# Altium PCB PCB1.PcbDoc (part 2 of 2)
Units mil, origin at the board's own origin, x right, y up, seen from the top; angles counter-clockwise.
Board outline 3937.01 x 3937.01 mil, 2 copper layers (Top Layer, Bottom Layer); 101 components, 66 nets, 397 pads, 63 vias.
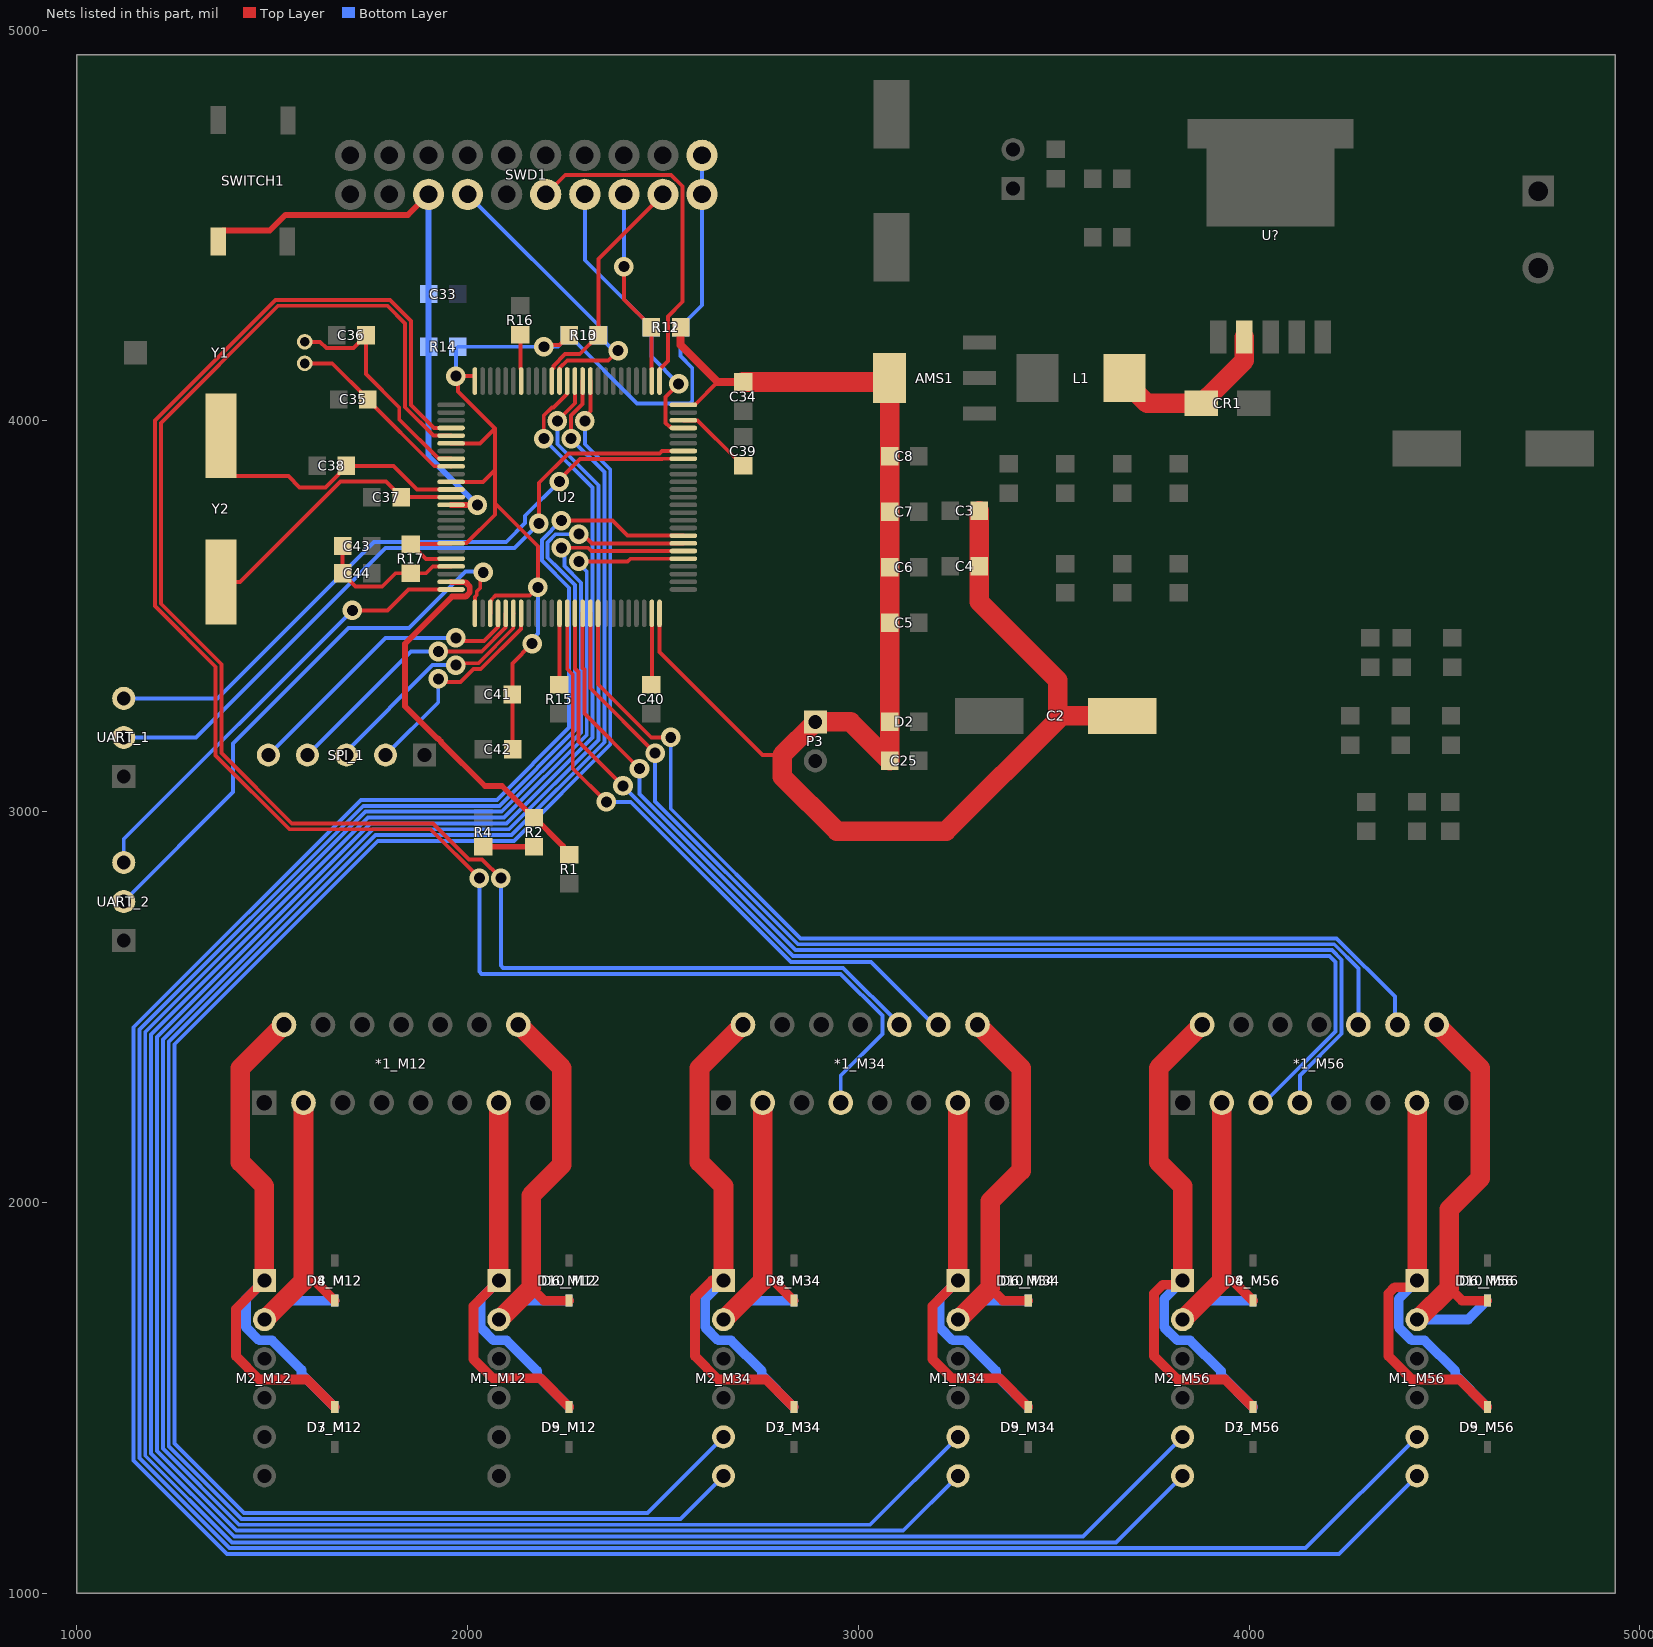
[diagram p2: the nets of this part, all layers, seen from the top]

## Via types
v1: diameter 50, hole 28, Top Layer to Bottom Layer, 63 vias

## Nets (pads, with @x,y where several pads share a name; then routed paths per layer and width w, separated by ;. In a path a pad name is that pad's centre, name@x,y a point inside that pad or via, vN(x,y) a via of type N, cw(c..) or ccw(c..) an arc to the next point about the centre after c; other vN are vias at no path point) (continued)
M3CTL2: *1_M34.7 U2.4 | length 4458.7
  Top Layer w10: U2.4@1957.76,3982.12 1957.41,3982.47 1913.89,3982.47 1855,4041.36 1855,4256.21 1801.21,4310 1508.79,4310 1200,4001.21 1200,3526.07 1355,3371.07 1355,3143.79 1543.79,2955 1905,2955 v1(2030,2830)
  Bottom Layer w10: v1(2030,2830) 2030,2590.86 2035.86,2585 2954.9,2585 3061.5,2478.4 3061.5,2431.51 2955,2325.02 *1_M34.7@2955,2255
M3EC1: M2_M34.5 U2.85 | length 4977.6
  Top Layer w10: v1(2300,4000) 2300,4010.82 2314.06,4024.88 U2.85@2314.06,4102.2
  Bottom Layer w10: v1(2300,4000) 2300,3940.5 2365,3875.5 2365,3171.51 2118.49,2925 1770.15,2925 1250,2404.85 1250,1382.57 1427.57,1205 2460,1205 M2_M34.5@2655,1400
M3EC2: M2_M34.6 U2.86 | length 4981.9
  Top Layer w10: v1(2265,3955) 2265,4014.5 2294.37,4043.87 U2.86@2294.37,4102.2
  Bottom Layer w10: v1(2265,3955) 2265,3954.29 2350,3869.29 2350,3177.72 2112.28,2940 1763.93,2940 1235,2411.07 1235,1376.36 1421.36,1190 2545,1190 M2_M34.6@2655,1300
M4CTL1: *1_M34.10 U2.5 | length 4194.7
  Top Layer w10: U2.5@1957.76,3962.44 1912.71,3962.44 1840,4035.15 1840,4250 1795,4295 1515,4295 1215,3995 1215,3532.28 1370,3377.28 1370,3150 1550,2970 1911.21,2970 2003.46,2877.76 2037.24,2877.76 v1(2085,2830)
  Bottom Layer w10: v1(2085,2830) 2085,2605.86 2090.86,2600 2961.11,2600 3105,2456.11 *1_M34.10@3105,2455
M4CTL2: *1_M34.12 U2.38 | length 1610.2
  Top Layer w10: U2.38@2255,3507.71 2255,3365.21 2269.06,3351.15 2269.06,3110.94 v1(2355,3025)
  Bottom Layer w10: v1(2355,3025) 2417.57,3025 2827.57,2615 3032.64,2615 3192.64,2455 *1_M34.12@3205,2455
M4EC1: M1_M34.5 U2.87 | length 5669
  Top Layer w10: v1(2230,4000) 2230,4000.71 2274.68,4045.4 U2.87@2274.68,4102.2
  Bottom Layer w10: v1(2230,4000) 2230,3940.5 2335,3835.5 2335,3183.93 2106.07,2955 1757.72,2955 1220,2417.28 1220,1370.15 1415.15,1175 3030,1175 M1_M34.5@3255,1400
M4EC2: M1_M34.6 U2.88 | length 5676
  Top Layer w10: v1(2195,3955) 2195,4014.5 2215.5,4035 2220.14,4035 2254.65,4069.52 2254.65,4101.85 U2.88@2255,4102.2
  Bottom Layer w10: v1(2195,3955) 2195,3954.29 2320,3829.29 2320,3190.15 2099.85,2970 1751.51,2970 1205,2423.49 1205,1363.93 1408.93,1160 3115,1160 M1_M34.6@3255,1300
M5CTL1: *1_M56.5 U2.39 | length 2947.5
  Top Layer w10: U2.39@2274.68,3507.71 2274.68,3366.73 2284.06,3357.36 2284.06,3179.73 v1(2397.71,3066.08)
  Bottom Layer w10: v1(2397.71,3066.08) 2833.11,2630.68 4205.68,2630.68 4221.5,2614.86 4221.5,2437.81 4038.68,2255 *1_M56.5@4030,2255
M5CTL2: *1_M56.7 U2.40 | length 2905.3
  Top Layer w10: U2.40@2294.37,3507.71 2294.37,3368.26 2299.06,3363.58 2299.06,3250.94 v1(2440,3110)
  Bottom Layer w10: v1(2440,3110) 2440,3045 2839.32,2645.68 4211.89,2645.68 4236.5,2621.08 4236.5,2431.6 4130,2325.1 *1_M56.7@4130,2255
M5EC1: M2_M56.5 U2.55 | length 6061.3
  Top Layer w10: v1(2285,3640.53) 2285.53,3640 2409.11,3640 2416.59,3647.47 U2.55@2552.24,3647.47
  Bottom Layer w10: v1(2285,3640.53) 2285,3634.68 2305,3614.68 2305,3196.36 2093.64,2985 1745.29,2985 1190,2429.71 1190,1357.72 1402.72,1145 3575,1145 M2_M56.5@3830,1400
M5EC2: M2_M56.6 U2.56 | length 6143.2
  Top Layer w10: v1(2240,3675) 2240.53,3675.53 2308.51,3675.53 2316.89,3667.16 U2.56@2552.24,3667.16
  Bottom Layer w10: v1(2240,3675) 2247.65,3667.35 2247.65,3628.38 2290,3586.04 2290,3202.57 2087.43,3000 1739.08,3000 1175,2435.92 1175,1351.51 1396.51,1130 3660,1130 M2_M56.6@3830,1300
M6CTL1: *1_M56.10 U2.41 | length 2671.3
  Top Layer w10: U2.41@2314.06,3507.71 2314.06,3315.94 v1(2480,3150)
  Bottom Layer w10: v1(2480,3150) 2480,3035 2479.75,3034.75 2479.75,3026.46 2845.53,2660.68 4218.11,2660.68 4280,2598.79 *1_M56.10@4280,2455
M6CTL2: *1_M56.12 U2.42 | length 2733.6
  Top Layer w10: U2.42@2333.74,3507.71 2333.74,3326.25 2469.99,3190 v1(2520,3190)
  Bottom Layer w10: v1(2520,3190) 2520,3007.43 2851.75,2675.68 4224.32,2675.68 4373.5,2526.5 4373.5,2461.5 *1_M56.12@4380,2455
M6EC1: M1_M56.5 U2.57 | length 6888.3
  Top Layer w10: v1(2285,3710.53) 2294.72,3710.53 2318.41,3686.84 U2.57@2552.24,3686.84
  Bottom Layer w10: v1(2285,3710.53) 2284.47,3710 2225.5,3710 2205,3689.5 2205,3650 2235,3620 2235,3619.82 2275,3579.82 2275,3208.79 2081.21,3015 1732.87,3015 1160,2442.13 1160,1345.29 1390.29,1115 4145,1115 M1_M56.5@4430,1400
M6EC2: M1_M56.6 U2.58 | length 6917.4
  Top Layer w10: v1(2240,3745) 2240.53,3745.53 2370.41,3745.53 2409.41,3706.53 U2.58@2552.24,3706.53
  Bottom Layer w10: v1(2240,3745) 2239.29,3745 2190,3695.71 2190,3643.08 2260,3573.08 2260,3215 2075,3030 1726.65,3030 1145,2448.35 1145,1339.08 1384.08,1100 4230,1100 M1_M56.6@4430,1300
MOTOR_A_OUTPUT1_M12: *1_M12.2 D3_M12.2 D7_M12.1 M2_M12.1 | length 1713.8
  Top Layer w25: M2_M12.1@1480,1800 1407.1,1727.1 1407.1,1606.39 1466.47,1547.03 1588.97,1547.03 1659.5,1476.5 D3_M12.2@1660,1476.5
  Top Layer w50: M2_M12.1@1480,1800 1480,2041.51 1418.5,2103.01 1418.5,2343.5 *1_M12.2@1530,2455
  Bottom Layer w25: M2_M12.1@1480,1800 1432.97,1752.97 1432.97,1680.52 1466.47,1647.03 1499.48,1647.03 1575.02,1571.49 1575.02,1560.98 1659.5,1476.5 D7_M12.1@1660,1476.5
MOTOR_A_OUTPUT1_M34: *1_M34.2 D3_M34.2 D7_M34.1 M2_M34.1 | length 1731.4
  Top Layer w25: M2_M34.1@2655,1800 2625,1800 2582.1,1757.1 2582.1,1606.39 2641.47,1547.03 2763.97,1547.03 2834.5,1476.5 D3_M34.2@2835,1476.5
  Top Layer w50: M2_M34.1@2655,1800 2655,2041.51 2593.5,2103.01 2593.5,2343.5 *1_M34.2@2705,2455
  Bottom Layer w25: M2_M34.1@2655,1800 2607.97,1752.97 2607.97,1680.52 2641.47,1647.03 2674.48,1647.03 2752.99,1568.52 2752.99,1558.01 2834.5,1476.5 D7_M34.1@2835,1476.5
MOTOR_A_OUTPUT1_M56: *1_M56.2 D3_M56.2 D7_M56.1 M2_M56.1 | length 1736.7
  Top Layer w25: M2_M56.1@3830,1800 3818.96,1788.96 3778.96,1788.96 3757.1,1767.1 3757.1,1606.39 3816.47,1547.03 3938.97,1547.03 D3_M56.2@4009.5,1476.5
  Top Layer w50: M2_M56.1@3830,1800 3830,2041.51 3768.5,2103.01 3768.5,2343.5 *1_M56.2@3880,2455
  Bottom Layer w25: M2_M56.1@3830,1800 3782.97,1752.97 3782.97,1680.52 3816.47,1647.03 3849.48,1647.03 3927.99,1568.52 3927.99,1558.01 4009.5,1476.5 D7_M56.1@4010,1476.5
MOTOR_A_OUTPUT2_M12: *1_M12.3 D4_M12.2 D8_M12.1 M2_M12.2 | length 898.1
  Top Layer w25: 1580,1798.52 1609.48,1798.52 1659.5,1748.5 D4_M12.2@1660,1748.5
  Top Layer w50: M2_M12.2@1480,1700 1481.48,1700 1580,1798.52 *1_M12.3@1580,2255
  Bottom Layer w25: M2_M12.2@1480,1700 1528.5,1748.5 D8_M12.1@1660,1748.5
MOTOR_A_OUTPUT2_M34: *1_M34.3 D4_M34.2 D8_M34.1 M2_M34.2 | length 898.1
  Top Layer w25: 2755,1798.52 2784.48,1798.52 2834.5,1748.5 D4_M34.2@2835,1748.5
  Top Layer w50: M2_M34.2@2655,1700 2656.48,1700 2755,1798.52 *1_M34.3@2755,2255
  Bottom Layer w25: M2_M34.2@2655,1700 2703.5,1748.5 D8_M34.1@2835,1748.5
MOTOR_A_OUTPUT2_M56: *1_M56.3 D4_M56.2 D8_M56.1 M2_M56.2 | length 898.1
  Top Layer w20: M2_M56.2@3830,1700 M2_M56.2@3831.48,1700
  Top Layer w25: 3930,1798.52 3959.48,1798.52 4009.5,1748.5 D4_M56.2@4010,1748.5
  Top Layer w50: M2_M56.2@3831.48,1700 3930,1798.52 *1_M56.3@3930,2255
  Bottom Layer w25: M2_M56.2@3830,1700 3878.5,1748.5 D8_M56.1@4010,1748.5
MOTOR_B_OUTPUT1_M12: *1_M12.13 D5_M12.2 D9_M12.1 M1_M12.1 | length 1435.6
  Top Layer w25: M1_M12.1@2080,1800 2015,1735 2015,1598.49 2063.49,1550 2186,1550 2259.5,1476.5 D5_M12.2@2260,1476.5
  Top Layer w50: M1_M12.1@2080,1800 *1_M12.13@2080,2255
  Bottom Layer w25: M1_M12.1@2080,1800 2032.97,1752.97 2032.97,1680.52 2066.47,1647.03 2099.48,1647.03 2177.99,1568.52 2177.99,1558.01 2259.5,1476.5 D9_M12.1@2260,1476.5
MOTOR_B_OUTPUT1_M34: *1_M34.13 D5_M34.2 D9_M34.1 M1_M34.1 | length 1435.1
  Top Layer w25: M1_M34.1@3255,1800 3190,1735 3190,1598.49 3238.49,1550 3361,1550 D5_M34.2@3434.5,1476.5
  Top Layer w50: M1_M34.1@3255,1800 *1_M34.13@3255,2255
  Bottom Layer w25: M1_M34.1@3255,1800 3207.97,1752.97 3207.97,1680.52 3241.47,1647.03 3274.48,1647.03 3352.99,1568.52 3352.99,1558.01 3434.5,1476.5 D9_M34.1@3435,1476.5
MOTOR_B_OUTPUT1_M56: *1_M56.13 D5_M56.2 D9_M56.1 M1_M56.1 | length 1465.6
  Top Layer w25: M1_M56.1@4430,1800 4412.97,1782.97 4372.97,1782.97 4357.1,1767.1 4357.1,1606.39 4416.47,1547.03 4538.97,1547.03 4609.5,1476.5 D5_M56.2@4610,1476.5
  Top Layer w50: M1_M56.1@4430,1800 *1_M56.13@4430,2255
  Bottom Layer w25: M1_M56.1@4430,1800 4382.97,1752.97 4382.97,1680.52 4416.47,1647.03 4449.48,1647.03 4527.99,1568.52 4527.99,1558.01 4609.5,1476.5 D9_M56.1@4610,1476.5
MOTOR_B_OUTPUT2_M12: *1_M12.14 D6_M12.2 D10_M12.1 M1_M12.2 | length 1179.9
  Top Layer w25: 2162.6,1781.12 2195.21,1748.5 D6_M12.2@2260,1748.5
  Top Layer w50: M1_M12.2@2080,1700 2081.48,1700 2162.6,1781.12 2162.6,2017.6 2241.5,2096.5 2241.5,2343.5 *1_M12.14@2130,2455
  Bottom Layer w25: M1_M12.2@2080,1700 2128.5,1748.5 D10_M12.1@2260,1748.5
MOTOR_B_OUTPUT2_M34: *1_M34.14 D6_M34.2 D10_M34.1 M1_M34.2 | length 1179.9
  Top Layer w25: 3337.6,1781.12 3370.21,1748.5 D6_M34.2@3435,1748.5
  Top Layer w50: M1_M34.2@3255,1700 3256.48,1700 3337.6,1781.12 3337.6,2002.6 3416.5,2081.5 3416.5,2343.5 *1_M34.14@3305,2455
  Bottom Layer w25: M1_M34.2@3255,1700 3303.5,1748.5 D10_M34.1@3435,1748.5
MOTOR_B_OUTPUT2_M56: *1_M56.14 D6_M56.2 D10_M56.1 M1_M56.2 | length 1179.9
  Top Layer w25: 4512.6,1781.12 4545.21,1748.5 D6_M56.2@4610,1748.5
  Top Layer w50: M1_M56.2@4430,1700 4431.48,1700 4512.6,1781.12 4512.6,1982.6 4591.5,2061.5 4591.5,2343.5 *1_M56.14@4480,2455
  Bottom Layer w25: M1_M56.2@4430,1700 4561,1700 4609.5,1748.5 D10_M56.1@4610,1748.5
NetC35_1: C35.1 U2.9 Y1.1 | length 485.3
  Top Layer w10: Y1.1@1583.11,4147.44 1653.54,4147.44 1744.8,4056.18 C35.1@1744.8,4055 1744.8,4053.82 1914.58,3884.04 1957.41,3884.04 U2.9@1957.76,3883.7
NetC36_1: C36.1 U2.8 Y1.2 | length 602.8
  Top Layer w10: Y1.2@1583.11,4202.56 1622.43,4202.56 1638.61,4186.38 1707.56,4186.38 C36.1@1740,4218.82 ; C36.1@1740,4220 C36.1@1740,4218.82 ; U2.8@1957.76,3903.38 1957.41,3903.73 1925.07,3903.73 1825,4003.8 1825,4035.01 1740,4120.01 C36.1@1740,4218.82
NetC37_1: C37.1 U2.13 Y2.2 | length 712.9
  Top Layer w10: Y2.2@1368.57,3587.99 1417.99,3587.99 1675,3845 1790.98,3845 1829.85,3806.14 C37.1@1829.8,3805 U2.13@1957.76,3804.95
NetC38_1: C38.1 U2.12 Y2.1 | length 732.7
  Top Layer w10: Y2.1@1368.57,3962.01 1368.57,3893.11 1402.94,3858.74 1541.26,3858.74 1570,3830 1635.98,3830 1689.8,3883.82 C38.1@1689.8,3885 1810.01,3885 1870.37,3824.64 U2.12@1957.76,3824.64
NetC39_2: C39.2 U2.73 | length 201.8
  Top Layer w10: U2.73@2552.24,4001.81 2552.59,4001.46 2588.54,4001.46 2686.38,3903.62 2686.38,3902.44 2703.82,3885 C39.2@2705,3885
NetC40_2: C40.2 U2.49 | length 183.3
  Top Layer w10: C40.2@2470,3325 2471.54,3326.54 U2.49@2471.54,3507.71
NetC43_1: C43.1 C44.1 R17.2 U2.22 | length 383.5
  Top Layer w10: C43.1@1680.2,3680 C44.1@1680.2,3610 1680.2,3608.82 1712.64,3576.38 1781.58,3576.38 1815.4,3610.2 R17.2@1855,3610.2 1893.62,3610.2 1910.87,3627.44 1957.41,3627.44 U2.22@1957.76,3627.79
NetCR1_1: CR1.1 L1.1 U?.2 | length 449.3
  Top Layer w50: L1.1@3681.22,4110 3681.22,4103.11 3739.33,4045 3888.5,4045 3896,4052.5 3896,4063 3988.07,4155.07 U?.2@3988.07,4214.86
NetR2_1: R2.1 R4.2 | length 130
  Top Layer w15: R4.2@2040,2910.2 R2.1@2170,2910.2
NetR15_1: R15.1 U2.37 | length 182.8
  Top Layer w10: R15.1@2235,3325 2235.32,3325.32 U2.37@2235.32,3507.71
NetR16_1: R16.1 U2.94 | length 118.8
  Top Layer w10: R16.1@2135,4220.2 2135,4134.11 2136.89,4132.22 U2.94@2136.89,4102.2
REF_12V/6: R1.2 R2.2 U2.24 | length 1030.9
  Top Layer w15: U2.24@1957.76,3588.42 1959.04,3587.14 1994.91,3587.14 2005.69,3576.36 2005.69,3561.11 1994.91,3550.33 1960.33,3550.33 1840,3430 1840,3270 1922.97,3187.03 1924.71,3187.03 1932.03,3179.71 1932.03,3177.97 2044.43,3065.57 2088.25,3065.57 2168.82,2985 R2.2@2170,2985 2171.18,2985 2243.88,2912.3 2243.88,2904.94 2258.82,2890 R1.2@2260,2890
RST: C33.2 R14.2 SWD1.15 SWITCH1.4 U2.14 | length 1511.9
  Top Layer w15: SWITCH1.4@1361.42,4459.49 1361.42,4475.24 1373.6,4487.42 1493.72,4487.42 1533.79,4527.49 1847.49,4527.49 SWD1.15@1900,4580 ; U2.14@1957.76,3785.27 1957.89,3785.13 2024.87,3785.13 v1(2025,3785)
  Bottom Layer w15: SWD1.15@1900,4580 1900.1,4579.9 1900.1,4190.1 R14.2@1900.2,4190 1900.2,3909.8 v1(2025,3785)
SPI_CLK: SPI_1.4 U2.30 | length 679.1
  Top Layer w10: v1(1925,3410) 2036.21,3410 2097.17,3470.96 2097.17,3507.36 U2.30@2097.52,3507.71
  Bottom Layer w10: SPI_1.4@1590,3145 1855,3410 v1(1925,3410)
SPI_MISO: SPI_1.3 U2.31 | length 605.2
  Top Layer w10: v1(1970,3375) 1975,3380 2027.43,3380 2116.86,3469.43 2116.86,3507.36 U2.31@2117.2,3507.71
  Bottom Layer w10: SPI_1.3@1690,3145 1690,3154.5 1910.5,3375 v1(1970,3375)
SPI_MOSI: SPI_1.2 U2.32 | length 561.7
  Top Layer w10: v1(1925,3340) 1932.65,3332.35 1982.35,3332.35 2015,3365 2033.64,3365 2136.54,3467.9 2136.54,3507.36 U2.32@2136.89,3507.71
  Bottom Layer w10: SPI_1.2@1790,3145 1925,3280 v1(1925,3340)
SPI_NSS: SPI_1.5 U2.29 | length 764.8
  Top Layer w10: v1(1970,3445) 1977.65,3437.35 2042.35,3437.35 2077.49,3472.49 2077.49,3507.36 U2.29@2077.83,3507.71
  Bottom Layer w10: SPI_1.5@1490,3145 1790,3445 v1(1970,3445)
SWCLK: SWD1.9 U2.76 | length 905.7
  Top Layer w10: SWD1.9@2200,4580 2250,4630 2520.71,4630 2550,4600.71 2550,4305.21 2512.56,4267.76 2512.56,4153.06 2491.22,4131.73 U2.76@2491.22,4102.2
SWDIO: R11.1 SWD1.7 U2.72 | length 748.8
  Top Layer w10: v1(2540,4095) 2506.81,4061.81 2506.81,3995.22 2516.13,3985.9 2518.45,3985.9 2522.23,3982.12 U2.72@2552.24,3982.12
  Bottom Layer w10: SWD1.7@2300,4580 2300,4411.38 2470.2,4241.18 R11.1@2470.2,4240 2470.2,4164.8 v1(2540,4095)
SWO: R10.1 SWD1.13 U2.89 | length 767.3
  Top Layer w10: U2.89@2235.32,4102.2 2235.66,4102.55 2235.66,4135.66 2255,4155 2360,4155 v1(2385,4180)
  Bottom Layer w10: SWD1.13@2000,4580 2335,4245 R10.1@2335,4220 2335,4218.82 2366.17,4187.65 2377.35,4187.65 v1(2385,4180)
TDI: R12.1 SWD1.5 U2.77 | length 507.4
  Top Layer w10: v1(2400,4395) 2400,4311.38 2470.2,4241.18 R12.1@2470.2,4240 2470.2,4133.56 2471.54,4132.22 U2.77@2471.54,4102.2
  Bottom Layer w10: v1(2400,4395) SWD1.5@2400,4580
TRST: R13.1 SWD1.3 U2.90 | length 617.9
  Top Layer w10: U2.90@2215.98,4102.55 U2.90@2215.63,4102.2 2215.63,4132.22 2219.41,4136 2219.41,4140.62 2249.79,4171 2286.98,4171 2334.8,4218.82 R13.1@2334.8,4220 2334.8,4414.8 SWD1.3@2500,4580
UART1_RX: U2.69 UART_1.2 | length 1797
  Top Layer w10: v1(2182.4,3737.6) 2182.4,3841.89 2257.76,3917.26 2491.76,3917.26 2497.56,3923.07 U2.69@2552.24,3923.07
  Bottom Layer w10: UART_1.2@1120,3190 1305,3190 1790,3675 2119.79,3675 v1(2182.4,3737.6)
UART1_TX: U2.68 UART_1.3 | length 1700.4
  Top Layer w10: v1(2235,3845) 2235,3850 2287.26,3902.26 2497.97,3902.26 2499.09,3903.38 U2.68@2552.24,3903.38
  Bottom Layer w10: UART_1.3@1120,3290 1360,3290 1760,3690 2098.99,3690 2147.4,3738.4 2147.4,3757.4 v1(2235,3845)
UART2_RX: U2.26 UART_2.2 | length 1457.8
  Top Layer w10: U2.26@2018.78,3507.71 2019.13,3508.06 2019.13,3549.8 2023.46,3554.14 2023.46,3563.76 2032.35,3572.65 2032.35,3604.82 v1(2040,3612.47)
  Bottom Layer w10: UART_2.2@1120,2770 1400,3050 1400,3175 1695,3470 1850,3470 1995,3615 2037.47,3615 v1(2040,3612.47)
UART2_TX: U2.25 UART_2.3 | length 1162.3
  Top Layer w10: v1(1705,3515) 1794.74,3515 1848.47,3568.73 U2.25@1957.76,3568.73
  Bottom Layer w10: UART_2.3@1120,2870 1120,2930 v1(1705,3515)
VCC: AMS1.2@3080.34,4110 C2.1 C3.2 C4.2 C5.2 C6.2 C7.2 C8.2 C25.1 C34.2 C41.2 C42.1 D2.1 P3.1 R10.2 R11.2 R12.2 R13.2 R14.1 R17.1 SWD1.1 SWD1.2 U2.6 U2.11 U2.19 U2.21 U2.28 U2.50 U2.75 U2.100 | length 7764.7
  Top Layer w10: R17.1@1855,3685 R17.1@1856.18,3685 ; U2.21@1957.76,3647.47 1957.41,3647.13 1894.05,3647.13 R17.1@1856.18,3685 ; U2.11@1957.76,3844.32 2039.32,3844.32 2070,3875 ; U2.6@1957.76,3942.75 1958.1,3942.4 2031.45,3942.4 2070,3980.95 ; U2.100@2018.78,4102.2 2018.78,4114.16 2017.94,4115 v1(1970,4115) 1975.95,4109.05 1975.95,4075 2070,3980.95 ; U2.28@2058.15,3507.71 2058.15,3537.73 2061.93,3541.51 2061.93,3543.83 2071.25,3553.14 2159.14,3553.14 v1(2180,3574) 2180,3679.5 2070,3789.5 ; C42.1@2115,3160 2115,3299.8 C41.2@2114.8,3300 2114.8,3379.8 v1(2165,3430) ; v1(2195,4190) 2200,4195 2235,4195 2241.38,4201.38 2242.56,4201.38 2260,4218.82 R13.2@2260,4220 ; U2.50@2491.22,3507.71 2491.22,3408.78 2755,3145 2805,3145 ; U2.75@2552.59,4041.52 U2.75@2552.24,4041.18 2581.37,4041.18 2640,4099.8 ; R17.1@1856.18,3685 1925.89,3685 1927.74,3686.84 U2.19@1957.76,3686.84 1958.1,3687.19 1997.19,3687.19 2070,3760 2070,3789.5 ; 2070,3789.5 2070,3875 ; 2070,3875 2070,3980.95
  Top Layer w20: R12.2@2545,4240 2545,4194.8 2640,4099.8 C34.2@2705,4099.8
  Top Layer w50: C34.2@2705,4099.8 3070.15,4099.8 AMS1.2@3080,4109.66 ; AMS1.2@3080.34,4110 AMS1.2@3080,4109.66 ; C3.2@3310,3770.28 C4.2@3310,3628.22 3310,3537.11 3511.01,3336.11 3511.01,3245 3520,3245 ; C2.1@3675.28,3245 3520,3245 ; AMS1.2@3080,4109.66 C8.2@3080,3910 C7.2@3080,3767.94 C6.2@3080,3625.89 C5.2@3080,3483.83 D2.1@3080,3230 C25.1@3080,3130 2980,3230 P3.1@2890,3230 2805,3145 2805,3090 2945,2950 3225,2950 3520,3245
  Bottom Layer w10: v1(1970,4115) 1970,4185 R14.1@1975,4190 v1(2195,4190) 2231.38,4190 R10.2@2260.2,4218.82 ; v1(2165,3430) 2165,3440.82 2180,3455.82 v1(2180,3574) ; R10.2@2260.2,4220 R10.2@2260.2,4218.82 ; SWD1.2@2600,4680 SWD1.1@2600,4580 2600,4296.18 2545,4241.18 R11.2@2545,4240 2545,4165.94 2575,4135.94 2575,4050.86 2569.14,4045 2434.02,4045 R10.2@2260.2,4218.82
pads on no net: AMS1.2@3310.66,4110 SWD1.11 SWD1.17 SWD1.19 SWITCH1.2 SWITCH1.3 U2.7 U2.15 U2.16 U2.17 U2.18 U2.23 U2.33 U2.34 U2.35 U2.36 U2.43 U2.44 U2.45 U2.46 U2.47 U2.48 U2.51 U2.52 U2.53 U2.54 U2.59 U2.60 U2.61 U2.62 U2.63 U2.64 U2.65 U2.66 U2.67 U2.70 U2.71 U2.78 U2.79 U2.80 U2.91 U2.92 U2.93 U2.95 U2.96 U?.5 Y1.4

## Polygon pours and split planes (outlines as drawn)
GND on Top Layer "GND_L01_P045" (solid, remove dead copper, pour order 45): 4930,4930 4930,1005 1005,1005 1005,4930
+12 on Top Layer "+12_L01_P023" (solid, remove dead copper, pour order 23): 4770,4750 4865,4655 4865,4550 4775,4460 4685,4460 4675,4450 4675,3555 4155,3035 4155,2560 4070,2475 1565,2475 1485,2555 1485,2730 2265,2730 2385,2850 3425,2850 3910,3335 3910,3535 4290,3915 4290,4710 4330,4750
+5 on Top Layer "+5_L01_P044" (solid, remove dead copper, pour order 44): 4080,2455 4100,2435 4280,2435 4280,2455 4345,2520 4345,2835 4155,3025 4155,2560 4080,2485
+5 on Top Layer "+5_L01_P000" (solid, remove dead copper, pour order 0): 3570,4225 3635,4290 3635,4610 3600,4645 3150,4645 3040,4535 3040,4360 3250,4150 3350,4150 3370,4130 3370,3980 3350,3960 3350,3885 3385,3850 3830,3850 3850,3830 3850,3610 3835,3595 3510,3595 3495,3580 3495,3510 3625,3380 3850,3380 3900,3430 3900,3525 4285,3910 4285,4280 4250,4315 4140,4315 4090,4265 4090,3925 4015,3850 3990,3850 3890,3950 3645,3950 3570,4025 3570,4040
+5 on Top Layer "+5_L01_P048" (solid, remove dead copper, pour order 48): 3870,1500 3715,1500 3625,1410 3635,1400 3870,1400
+5 on Top Layer "+5_L01_P046" (solid, remove dead copper, pour order 46): 2695,1500 2540,1500 2450,1410 2460,1400 2695,1400
+5 on Top Layer "+5_L01_P039" (solid, remove dead copper, pour order 39): 4080,2455 4130,2455 4330,2255 4430,2255 4430,1400 4140,1400 4080,1460
MOTOR_B_OUTPUT2_M56 on Top Layer "MOTOR_B_OUTPUT2_M56_L01_P020" (solid, remove dead copper, pour order 20): 4450,2530 4415,2495 4415,2385 4460,2340 4520,2340 4560,2300 4560,2135 4460,2035 4460,1815 4430,1785 4380,1785 4380,1625 4405,1600 4555,1600 4640,1685 4640,1767.75 4610,1797.75 4610,1855 4715,1960 4715,2480 4665,2530
+12 on Top Layer "+12_L01_P041" (solid, remove dead copper, pour order 41): 3305,2455 3405,2555 3880,2555 3980,2455 3830,2305 3830,1600 3530,1300 3255,1300 3255,2255
+12 on Top Layer "+12_L01_P040" (solid, remove dead copper, pour order 40): 2130,2455 2230,2555 2705,2555 2805,2455 2655,2305 2655,1600 2355,1300 2080,1300 2080,2255
+5 on Top Layer "+5_L01_P038" (solid, remove dead copper, pour order 38): 2905,2455 2955,2455 3155,2255 3255,2255 3255,1400 2965,1400 2905,1460
+5 on Top Layer "+5_L01_P037" (solid, remove dead copper, pour order 37): 1730,2455 1780,2455 1980,2255 2080,2255 2080,1400 1790,1400 1730,1460
+5 on Top Layer "+5_L01_P036" (solid, remove dead copper, pour order 36): 3830,1600 3886.5,1600 4010,1476.5 4010,1410 4000,1400 3830,1400
+5 on Top Layer "+5_L01_P035" (solid, remove dead copper, pour order 35): 3255,1600 3311.5,1600 3435,1476.5 3435,1410 3425,1400 3255,1400
+5 on Top Layer "+5_L01_P034" (solid, remove dead copper, pour order 34): 2655,1600 2711.5,1600 2835,1476.5 2835,1410 2825,1400 2655,1400
+5 on Top Layer "+5_L01_P032" (solid, remove dead copper, pour order 32): 2080,1600 2136.5,1600 2260,1476.5 2260,1410 2250,1400 2080,1400
+5 on Top Layer "+5_L01_P031" (solid, remove dead copper, pour order 31): 1480,1600 1536.5,1600 1660,1476.5 1660,1410 1650,1400 1480,1400
+12 on Top Layer "+12_L01_P030" (solid, remove dead copper, pour order 30): 3880,2455 4080,2455 4080,2305 4130,2255 4130,1385 4080,1335 3995,1335 3995,1461.5 4010,1476.5 4010,2175 3930,2255
+12 on Top Layer "+12_L01_P029" (solid, remove dead copper, pour order 29): 2705,2455 2905,2455 2905,2305 2955,2255 2955,1385 2905,1335 2820,1335 2820,1461.5 2835,1476.5 2835,2175 2755,2255
+12 on Top Layer "+12_L01_P028" (solid, remove dead copper, pour order 28): 1530,2455 1730,2455 1730,2305 1780,2255 1780,1385 1730,1335 1645,1335 1645,1461.5 1660,1476.5 1660,2175 1580,2255
VCC on Top Layer "VCC_L01_P027" (solid, remove dead copper, pour order 27): 3767.87,3187.87 3767.87,3237.13 3735,3270 3393,3270 3130,3007 3130,2855 3435,2855
+12 on Top Layer "+12_L01_P026" (solid, remove dead copper, pour order 26): 3835,2555 3910,2480 3910,2425 3950,2385 4015,2385 4075,2445 4075,2555
+12 on Top Layer "+12_L01_P025" (solid, remove dead copper, pour order 25): 2660,2555 2735,2480 2735,2425 2775,2385 2840,2385 2900,2445 2900,2555
+12 on Top Layer "+12_L01_P024" (solid, remove dead copper, pour order 24): 1485,2555 1560,2480 1560,2425 1600,2385 1665,2385 1725,2445 1725,2555
+5 on Top Layer "+5_L01_P043" (solid, remove dead copper, pour order 43): 1580,1430 1535,1385 1535,1225 1635,1125 4300,1125 4345,1170 4345,1380 4295,1430
MOTOR_A_OUTPUT2_M56 on Top Layer "MOTOR_A_OUTPUT2_M56_L01_P022" (solid, remove dead copper, pour order 22): 3810,2315 3980,2315 4020,2275 4020,1685 3935,1600 3863.49,1600 3782.97,1680.52 3782.97,1742.97 3810,1770
MOTOR_A_OUTPUT1_M56 on Top Layer "MOTOR_A_OUTPUT1_M56_L01_P021" (solid, remove dead copper, pour order 21): 3775,2505 3880,2505 3915,2470 3915,2315 3810,2315 3810,1910 3875,1845 3875,1785 3845,1755 3735,1755 3670,1820 3670,2400
MOTOR_B_OUTPUT2_M34 on Top Layer "MOTOR_B_OUTPUT2_M34_L01_P019" (solid, remove dead copper, pour order 19): 3275,2530 3240,2495 3240,2385 3285,2340 3345,2340 3385,2300 3385,2135 3285,2035 3285,1815 3255,1785 3205,1785 3205,1625 3230,1600 3380,1600 3465,1685 3465,1767.75 3435,1797.75 3435,1855 3540,1960 3540,2480 3490,2530
MOTOR_B_OUTPUT1_M56 on Top Layer "MOTOR_B_OUTPUT1_M56_L01_P018" (solid, remove dead copper, pour order 18): 4365,2330 4480,2330 4515,2295 4515,2045 4470,2000 4470,1770 4440,1740 4325,1740 4260,1805 4260,2120 4345,2205 4365,2205
MOTOR_B_OUTPUT1_M34 on Top Layer "MOTOR_B_OUTPUT1_M34_L01_P017" (solid, remove dead copper, pour order 17): 3190,2330 3305,2330 3340,2295 3340,2045 3295,2000 3295,1770 3265,1740 3150,1740 3085,1805 3085,2120 3170,2205 3190,2205
MOTOR_B_OUTPUT2_M12 on Top Layer "MOTOR_B_OUTPUT2_M12_L01_P014" (solid, remove dead copper, pour order 14): 2100,2530 2065,2495 2065,2385 2110,2340 2170,2340 2210,2300 2210,2135 2110,2035 2110,1815 2080,1785 2030,1785 2030,1625 2055,1600 2205,1600 2290,1685 2290,1767.75 2260,1797.75 2260,1855 2365,1960 2365,2480 2315,2530
MOTOR_A_OUTPUT2_M34 on Top Layer "MOTOR_A_OUTPUT2_M34_L01_P016" (solid, remove dead copper, pour order 16): 2635,2315 2805,2315 2845,2275 2845,1685 2760,1600 2688.49,1600 2607.97,1680.52 2607.97,1742.97 2635,1770
MOTOR_A_OUTPUT2_M12 on Top Layer "MOTOR_A_OUTPUT2_M12_L01_P010" (solid, remove dead copper, pour order 10): 1460,2315 1630,2315 1670,2275 1670,1685 1585,1600 1513.49,1600 1432.97,1680.52 1432.97,1742.97 1460,1770
MOTOR_A_OUTPUT1_M34 on Top Layer "MOTOR_A_OUTPUT1_M34_L01_P015" (solid, remove dead copper, pour order 15): 2600,2505 2705,2505 2740,2470 2740,2315 2635,2315 2635,1910 2700,1845 2700,1785 2670,1755 2560,1755 2495,1820 2495,2400
MOTOR_B_OUTPUT1_M12 on Top Layer "MOTOR_B_OUTPUT1_M12_L01_P013" (solid, remove dead copper, pour order 13): 2015,2330 2130,2330 2165,2295 2165,2045 2120,2000 2120,1770 2090,1740 1975,1740 1910,1805 1910,2120 1995,2205 2015,2205
MOTOR_A_OUTPUT1_M12 on Top Layer "MOTOR_A_OUTPUT1_M12_L01_P009" (solid, remove dead copper, pour order 9): 1425,2505 1535,2505 1565,2475 1565,2315 1460,2315 1460,1910 1525,1845 1525,1785 1495,1755 1385,1755 1320,1820 1320,2400
VCC on Top Layer "VCC_L01_P004" (solid, remove dead copper, pour order 4): 1945,4160 2075,4160 2220,4305 2480,4305 2575,4400 2625,4400 2785,4240 2785,3525 2380,3120 2085,3120 2000,3205 2000,3475 1900,3575 1835,3575 1795,3615 1795,4005 1795,4010
VCC on Top Layer "VCC_L01_P003" (solid, pour order 3): 2585,4750 2555,4720 2555,2935 2635,2855 3155,2855 3155,4120 2790,4485 2790,4675 2715,4750 2660,4750
GND on Bottom Layer "GND_L02_P047" (solid, pour order 47): 4930,4930 4930,1005 1005,1005 1005,4930
+5 on Bottom Layer "+5_L02_P007" (solid, remove dead copper, pour order 7): 3660,3485 3775,3600 4040,3600 4355,3285 4355,2785 4250,2680 3745,2680 3660,2765
VCC on Bottom Layer "VCC_L02_P006" (solid, remove dead copper, pour order 6): 2447.57,4270 1960,4270 1890,4200 1890,4100 1975,4015 2600,4015 2725,4140 2725,4715 2715,4725 2594.08,4725 2555,4685.92 2555,4385 2488.58,4318.58
VCC on Bottom Layer "VCC_L02_P001" (solid, remove dead copper, pour order 1): 2182.79,3635.87 2249.8,3568.85 2249.8,3369.8 2220,3340 2110,3340 2085,3365 2085,3610 2120,3645 2170,3645

## Keep-outs
Keep-Out Layer:
  circle w10: c2850.39,3559.06 r62.99
  circle w10: c4795.28,1141.73 r62.99
  circle w10: c1141.73,4795.28 r62.99
  circle w10: c1141.73,1141.73 r62.99
  lines w10: 1000,1000 4937.01,1000 4937.01,4937.01 1000,4937.01 1000,1000

## Text inside footprints (layer, text, board x,y; h text height)
D3_M12: Mechanical 13 "*" at 1685,1387 h50 r90
D3_M34: Mechanical 13 "*" at 2860,1387 h50 r90
D3_M56: Mechanical 13 "*" at 4035,1387 h50 r90
D4_M12: Mechanical 13 "*" at 1635,1838 h50 r270
D4_M34: Mechanical 13 "*" at 2810,1838 h50 r270
D4_M56: Mechanical 13 "*" at 3985,1838 h50 r270
D5_M12: Mechanical 13 "*" at 2285,1387 h50 r90
D5_M34: Mechanical 13 "*" at 3460,1387 h50 r90
D5_M56: Mechanical 13 "*" at 4635,1387 h50 r90
D6_M12: Mechanical 13 "*" at 2235,1838 h50 r270
D6_M34: Mechanical 13 "*" at 3410,1838 h50 r270
D6_M56: Mechanical 13 "*" at 4585,1838 h50 r270
D7_M12: Mechanical 13 "*" at 1685,1463 h50 r90
D7_M34: Mechanical 13 "*" at 2860,1463 h50 r90
D7_M56: Mechanical 13 "*" at 4035,1463 h50 r90
D8_M12: Mechanical 13 "*" at 1635,1762 h50 r270
D8_M34: Mechanical 13 "*" at 2810,1762 h50 r270
D8_M56: Mechanical 13 "*" at 3985,1762 h50 r270
D9_M12: Mechanical 13 "*" at 2285,1463 h50 r90
D9_M34: Mechanical 13 "*" at 3460,1463 h50 r90
D9_M56: Mechanical 13 "*" at 4635,1463 h50 r90
D10_M12: Mechanical 13 "*" at 2235,1762 h50 r270
D10_M34: Mechanical 13 "*" at 3410,1762 h50 r270
D10_M56: Mechanical 13 "*" at 4585,1762 h50 r270
M1_M12: Top Overlay "Red" at 2050,2030 h60 r270
M1_M34: Top Overlay "Red" at 3225,2030 h60 r270
M1_M56: Top Overlay "Red" at 4400,2030 h60 r270
M2_M12: Top Overlay "Red" at 1450,2030 h60 r270
M2_M34: Top Overlay "Red" at 2625,2030 h60 r270
M2_M56: Top Overlay "Red" at 3800,2030 h60 r270
P1: Top Overlay "12V" at 4440,4555 h60; Top Overlay "GND" at 4430,4360 h60
P2: Top Overlay "GND" at 3425.99,4755 h60 r90
P3: Top Overlay "GND" at 2860,3070 h60 r270
SPI_1: Top Overlay "NSS" at 1520,3220 h60 r90; Top Overlay "GND" at 1920,3220 h60 r90; Top Overlay "MOSI" at 1820,3220 h60 r90; Top Overlay "MISO" at 1720,3220 h60 r90; Top Overlay "CLK" at 1620,3220 h60 r90
SWD1: Bottom Overlay "1" at 2785,4480 h60
U?: Top Overlay "u" at 4273,4765 h50 r270
UART_1: Top Overlay "TX" at 1195,3260 h60; Top Overlay "RX" at 1195,3160 h60; Top Overlay "GND" at 1195,3060 h60
UART_2: Top Overlay "TX" at 1195,2840 h60; Top Overlay "RX" at 1195,2740 h60; Top Overlay "GND" at 1195,2640 h60
Y1: Top Overlay "32768_AT38" at 1135,4256.66 h40
Y2: Top Overlay "16M" at 1508.57,4000 h60 r270